# Altium PCB ClassA.PcbDoc
Units mm, origin at the board's own origin, x right, y up, seen from the top; angles counter-clockwise.
Board outline 100 x 57 mm, 2 copper layers (Top Layer, Bottom Layer); 25 components, 11 nets, 90 pads, 2 vias.
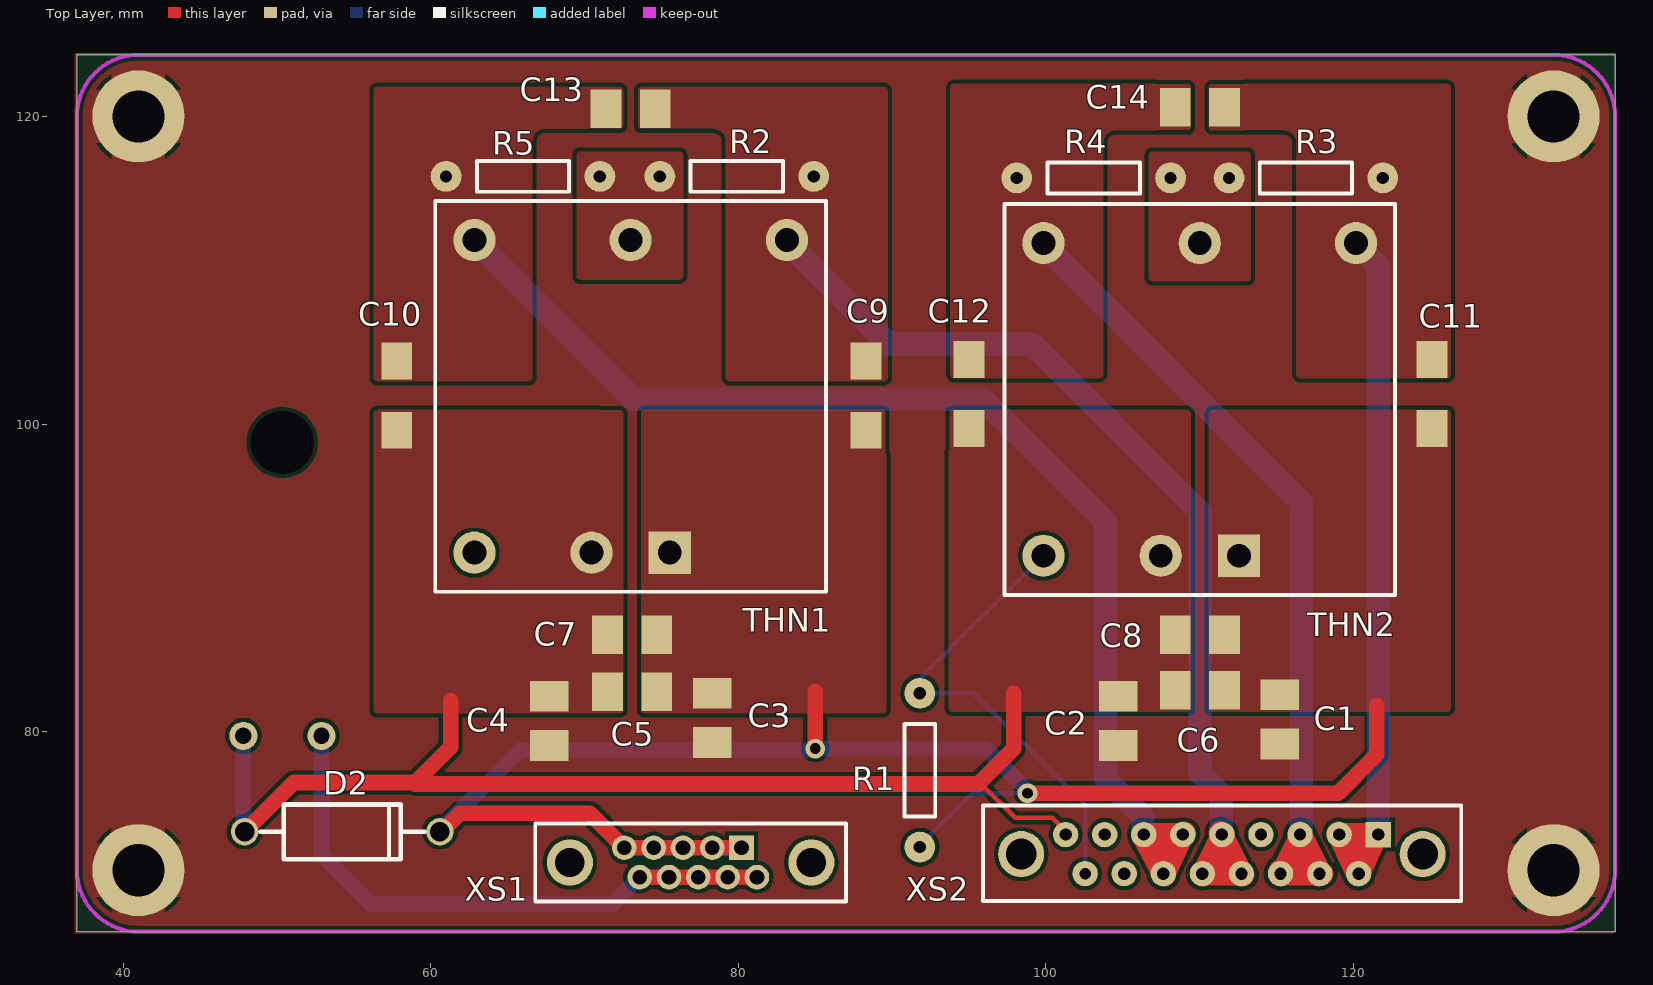
[diagram p0: Top Layer view]
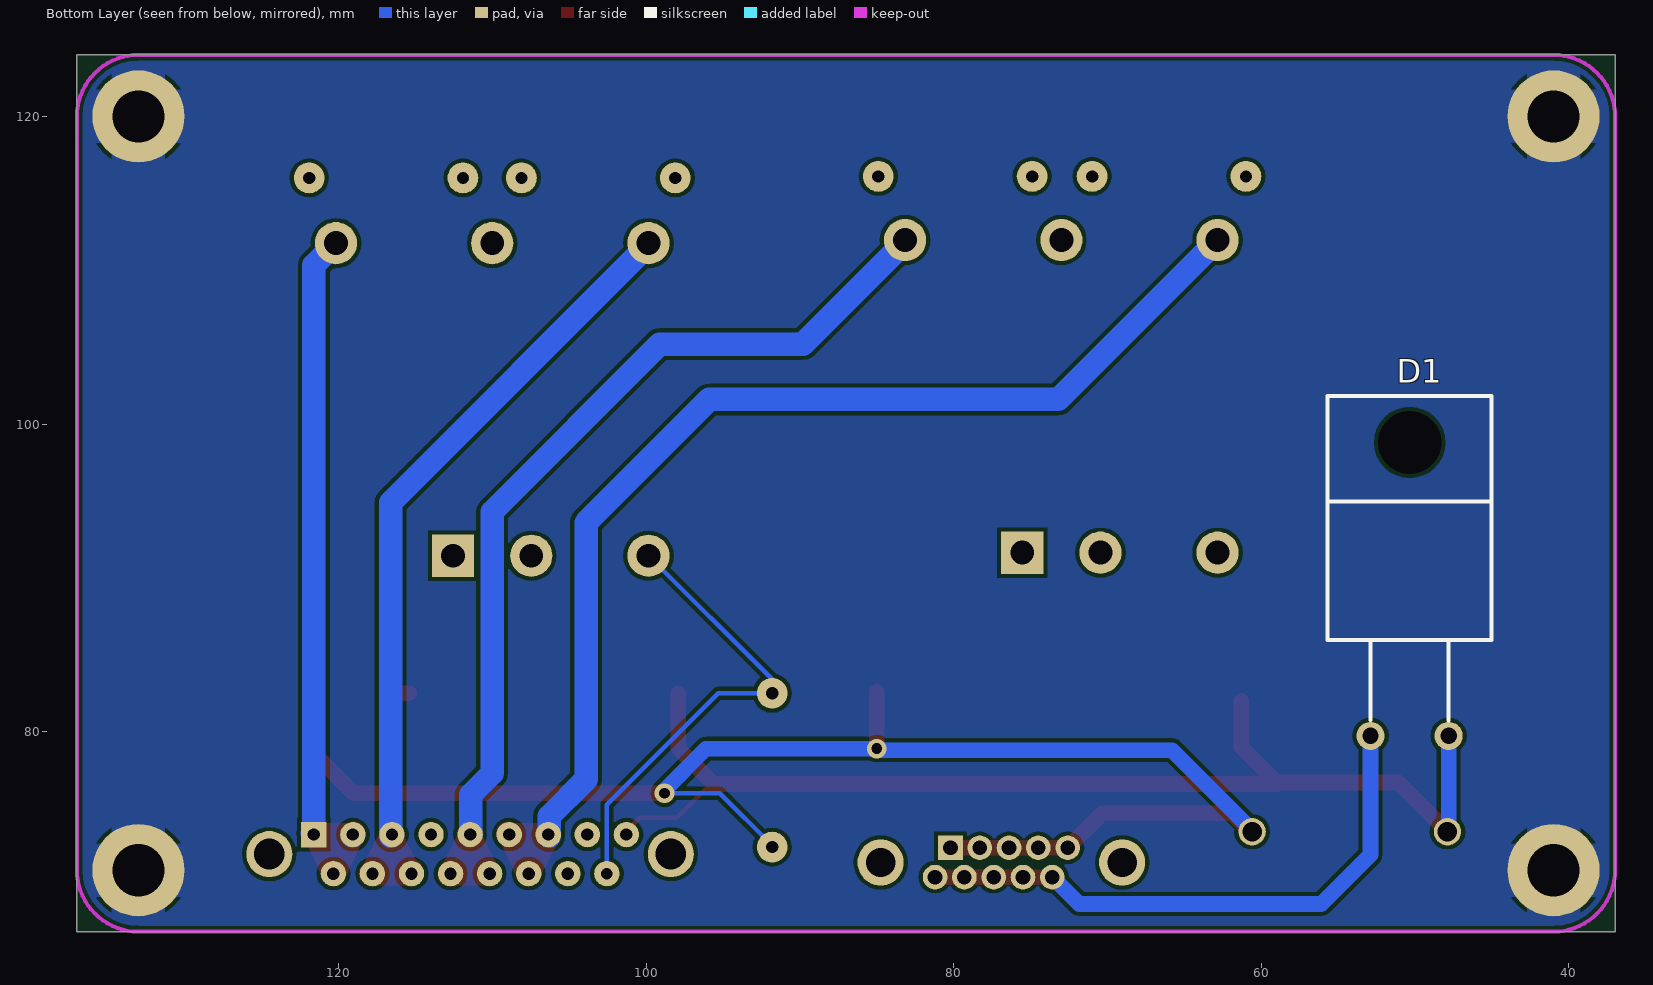
[diagram p1: Bottom Layer view, seen from below]

## Layer stack, top to bottom
Top Layer: signal copper 0.0356
Dielectric: dielectric 0.32, FR-4, Dk 4.8
Bottom Layer: signal copper 0.0356

## Board outline
37,124 137,124 137,67 37,67 37,124

## Components (designator, comment, footprint, x,y, rotation, side; value= is the part's Value field where it differs from the comment)
C1 "" 3225 115.2,82.4 r270 top
C2 "" 3225 104.7,79.1 r90 top
C3 "" 3225 78.3,82.5 r270 top
C4 "" 3225 67.7,79.1 r90 top
C5 "10uF/25V" 3225 74.7,82.6 r180 top
C6 "10uF/25V" 3225 111.6,82.7 r180 top
C7 "1uF/25V" 3225 74.7,86.3 r180 top
C8 "1uF/25V" 3225 111.6,86.3 r180 top
C9 "470pF/2KV" 4520 88.3,99.6 r90 top
C10 "470pF/2KV" 4520 57.8,99.6 r90 top
C11 "470pF/2KV" 4520 125.1,99.7 r90 top
C12 "470pF/2KV" 4520 95,99.7 r90 top
C13 "10uF/25V" 3225 74.6,120.5 r180 top
C14 "10uF/25V" 3225 111.6,120.6 r180 top
D1 "SB10100" SB1030 65.6,84.3 r180 bottom
D2 "P6KE22A" P6KE22A 47.9,74 r180 top
R1 "100欧限流电阻" res 91.8,82.5 r270 top
R2 "调压电阻" res 74.9,116.1 r0 top
R3 "调压电阻" res 111.9,116 r0 top
R4 "调压电阻" res 108.1,116 r180 top
R5 "调压电阻" res 71,116.1 r180 top
THN1 "THN15-1211" THN12-1211 85.7,114.5 r180 top locked
THN2 "THN15-1212" THN12-1212 122.7,114.3 r180 top locked
XS1 "直式不带安装耳插座" 10pin 76.9,71.5 r270 top
XS2 "直式不带安装耳插座" 17pin 95.8,75.1 r270 top locked

## Footprints (in the part's own frame and the unit in brackets; to place one, negate y for a bottom-side part, rotate by r counter-clockwise, add the part's x,y. Pads: shape width x height; smd on the part's side, far side on the other; paste and mask are expansions set on the pad)
10pin [mil] "CRM242-010-221-8800"
  round 118.11 hole 75: 0(0,309.06) 0(0,-309.06)
  rect 63x63 hole 37.48: 1(-37.5,130.32)
  round 63 hole 37.48: 2(37.5,169.68) 3(-37.5,55.32) 4(37.5,94.68) 5(-37.5,-19.68) 6(37.5,19.68) 7(-37.5,-94.68) 8(37.5,-55.32) 9(-37.5,-169.68) 10(37.5,-130.32)
  silkscreen extent -100,-398 100,398
17pin [mil] "CY23Z17BJ-RL"
  round 118.11 hole 78.74: 0(120.39,1129.41) 0(120.39,101.85)
  rect 65x65 hole 31.5: 1(70.39,1015.63)
  round 65 hole 31.5: 2(170.39,965.63) 3(70.39,915.63) 4(170.39,865.63) 5(70.39,815.63) 6(170.39,765.63) 7(70.39,715.63) 8(170.39,665.63) 9(70.39,615.63) 10(170.39,565.63) 11(70.39,515.63) 12(170.39,465.63) 13(70.39,415.63) 14(170.39,365.63) 15(70.39,315.63) 17(70.39,215.63)
  round 65 hole 30: 16(170.39,265.63)
  silkscreen extent -4,4 240,1228
3225 [mm] "TDK电容 C3225X5R1E106K  差模电容"
  rect 2x2.5 smd: 1(0,0) 2(3.2,0)
4520 [mm] "TDK Capacity"
  rect 2.4x2 smd: 1(0,0) 2(4.5,0)
P6KE22A [mil] "600W瞬态抑制管起过压保护"
  round 70 hole 50: 1(0,19.68) 2(-500,19.68)
  silkscreen extent -461,-50 -40,91
res [mm]
  round 2 hole 0.8: 1(0,0) 2(10,0)
  silkscreen extent 2,-1 8,1
SB1030 [mil] "10A肖特基势垒整流器起反接保护"
  round 60 hole 161.42: 0(600.39,570.87)
  round 72 hole 42: 1(700,-180) 2(500,-180)
  silkscreen extent 390,-141 810,690
THN12-1211 [mil] "DC/DC Converter"
  rect 108x108 hole 61: 1(400,900)
  round 108 hole 61: 2(600,900) 3(900,900) 4(100,100) 5(500,100) 6(900,100)
  silkscreen extent 0,0 1000,1000
THN12-1212 [mil] "DC/DC Converter"
  rect 108x108 hole 61: 1(400,900)
  round 108 hole 61: 2(600,900) 3(900,900) 4(100,100) 5(500,100) 6(900,100)
  silkscreen extent 0,0 1000,1000

## Part data
C1 C2 C3 C4: library part "Cap Semi", "封装未定，选大号封装"
C5 C6: library part CAP, "TDK电容 C3225X7R1E106K  差模电容 EMC"
C7 C8: library part CAP, "TDK电容 C3225X7R1E106K  差模电容 去纹波"
C9 C10 C11 C12: library part CAP, "Capacitor TDK C4520X7R3D471K"
C13 C14: library part CAP, "TDK电容 C3225X7R1E106K  差模电容"
D1: library part DIODE, "10A肖特基势垒整流器 君耀雷神 反接保护"
D2: library part DIODE, "君耀雷神 600W瞬态抑制管 过压保护"
R1 R2 R3 R4 R5: library part "Res Semi", "718友益 RMK1608(厚膜) 100欧"
XS1: library part "Header 5X2", "CRM242-010-221-8800 中航光电"
XS2: library part CON17, "CY23Z17BJ-RL 中航光电"

## Free pads (board coordinates)
  round 6 hole 3.4: 1(41,71) 2(41,120) 3(133,120) 4(133,71)

## Via types
v1: diameter 1.27, hole 0.711, Top Layer to Bottom Layer, 2 vias

## Nets (pads, with @x,y where several pads share a name; then routed paths per layer and width w, separated by ;. In a path a pad name is that pad's centre, name@x,y a point inside that pad or via, vN(x,y) a via of type N, cw(c..) or ccw(c..) an arc to the next point about the centre after c; other vN are vias at no path point)
5GND: C10.2 C13.2 R5.2 THN1.6 XS2.11 XS2.12 XS2.13 | length 80.2
  Top Layer w1.524: XS2.13@106.3,73.3 XS2.12@107.7,70.7 ; XS2.13@106.4,73.3 XS2.13@106.369,73.3 ; XS2.13@106.4,73.312 XS2.11 108.912,73.312 XS2.11@109,73.4 ; XS2.12@107.668,70.732 107.675,70.749 XS2.11@108.9,73.4 ; 108.1,71.9 XS2.11@108.791,73.34 ; XS2.13@106.369,73.3 XS2.13 XS2.13@106.369,73.3
  Bottom Layer w1.524: THN1.6 73.2,101.6 95.9,101.6 103.9,93.6 103.9,76.9 106.3,74.5 XS2.13@106.3,73.2
12GND: C12.2 C14.2 R4.2 THN2.6 XS2.4 XS2.5 XS2.6 | length 54.3
  Top Layer w1.524: XS2.6@115.228,70.772 XS2.6 ; XS2.6@115.3,70.7 XS2.5@116.6,73.3 ; XS2.6@115.347,70.947 115.247,70.947 XS2.6 ; XS2.5@116.5,73.4 116.539,73.323 XS2.4@117.8,70.8 ; XS2.4@117.7,70.7 XS2.4@117.7,70.772 ; XS2.4@117.7,70.8 XS2.4@117.7,70.772 ; XS2.4@117.928,70.772 XS2.4 XS2.4@117.7,70.772 ; XS2.6 XS2.4@117.7,70.772
  Bottom Layer w1.524: THN2.6@99.8,111.7 116.6,94.9 XS2.5@116.6,73.2
+5VOUT: C9.2 C13.1 R2.2 THN1.4 XS2.8 XS2.9 XS2.10 | length 64.6
  Top Layer w1.524: XS2.10@110.2,70.7 XS2.9@111.52,73.34 ; XS2.10@110.3,70.8 110.328,70.772 XS2.8 ; XS2.9@111.334,73.444 112.7,70.7 XS2.8@112.8,70.7 ; XS2.9@111.428,73.328 XS2.9 XS2.9@111.437,73.037
  Bottom Layer w1.524: THN1.4@83.1,111.9 89.8,105.2 99.1,105.2 110,94.3 110,77.3 111.4,75.9 XS2.9@111.4,73.3
+12VOUT: C11.2 C14.1 R3.2 THN2.4 XS2.1 XS2.2 XS2.3 | length 50.8
  Top Layer w1.524: XS2.3@119,73.4 XS2.3@119.088,73.312 ; XS2.3 XS2.3@119.088,73.312 ; XS2.3@119.1,73.269 120.277,70.749 120.3,70.7 XS2.1@121.461,73.312 ; XS2.2 XS2.1@121.461,73.312 ; XS2.1@121.5,73.4 121.483,73.363 XS2.1@121.461,73.312 ; XS2.1 XS2.1@121.461,73.312 ; XS2.1@121.6,73.4 121.512,73.312 XS2.3@119.088,73.312
  Bottom Layer w1.524: XS2.3 119.045,73.3 XS2.3@119.1,73.245 ; XS2.3@119.1,73.3 XS2.3@119.112,73.312 ; THN2.4 121.6,110.32 XS2.1@121.6,73.4 ; XS2.1 121.612,73.312 XS2.1@121.7,73.4 ; XS2.1@121.6,73.3 XS2.1@121.6,73.312 ; XS2.1@121.6,73.312 XS2.1@121.6,73.4 ; XS2.1@121.6,73.312 XS2.1@121.6,73.4
+14.4V: C1.1 C3.1 C5.1 C6.1 C7.1 C8.1 C9.1 C11.1 D2.2 R1.2 THN1.1 THN2.1 XS1.1 XS1.3 XS1.5 XS1.7 XS1.9 | length 102.1
  Top Layer w1.016: D2.2@60.7,73.5 61.9,74.7 70.343,74.7 XS1.9 XS1.7 XS1.5 XS1.3 80.152,72.452 XS1.1@80.2,72.5 ; v1(85,78.9) 85,82.6 ; v1(98.8,76) 119,76 121.4,78.4 121.4,78.5 ; C1.1@115.4,82.5 C1.1@115.9,82.5 ; 121.5,78.5 121.5,81.7
  Bottom Layer w0.3: R1.2 91.8,72.6 95.2,76 v1(98.8,76)
  Bottom Layer w1.016: D2.2@60.5,73.6 60.6,73.6 65.8,78.8 v1@85,78.8 ; v1(85,78.9) 96.1,78.9 v1@98.8,76.2
GND2: C2.2 C4.2 C5.2 C6.2 C7.2 C8.2 C10.1 C12.1 D1.1 D2.1 THN1.2 THN2.2 XS2.17 | length 75.3
  Top Layer w0.3: 95.7,76.7 98,74.4 100.4,74.4 101.3,73.5 XS2.17@101.3,73.4
  Top Layer w1.016: D2.1 51.1,76.7 59,76.7 61.3,79 61.3,82 ; 59,76.6 95.7,76.6 ; 95.7,76.7 97.9,78.9 97.9,82.5
  Bottom Layer w1.016: D2.1@47.82,73.58 D1.1
GNDP: D1.2 XS1.2 XS1.4 XS1.6 XS1.8 XS1.10 | length 38.1
  Top Layer w1.016: XS1.10 XS1.8 XS1.6 XS1.4 81.153,70.547 XS1.2@81.2,70.5
  Bottom Layer w1.016: D1.2@52.9,79.7 52.9,72 56.1,68.8 71.843,68.8 XS1.10
KGND: C1.2 C2.1 C3.2 C4.1 pad.1 pad.2 pad.3 pad.4
NetR2_1: R2.1 R5.1 THN1.5
NetR3_1: R3.1 R4.1 THN2.5
RCOP: R1.1 THN2.3 XS2.16 | length 29.6
  Bottom Layer w0.3: R1.1 95.3,82.5 102.547,75.253 XS2.16 ; R1.1@91.8,83.4 THN2.3
pads on no net: D1.0 THN1.3 XS1.0 XS2.0 XS2.7 XS2.14 XS2.15

## Polygon pours and split planes (outlines as drawn)
KGND on Top Layer "Top Layer-No Net" (solid): 37,124 137,124 137,67 37,67 37,123.9 36.9,124
KGND on Top Layer "Top Layer-No Net" (solid): 36.9,124 37,124.1 137,124.1 137,67.1 136.9,67 136.8,66.9 36.9,66.9 36.9,124 37,124.1
5GND on Top Layer "Top Layer-No Net" (solid, pour order 1000): 56,122.2 72.8,122.2 72.8,118.9 67.4,118.9 67.4,118.5 66.9,118.5 66.9,102.6 66.8,102.5 66.7,102.4 56,102.4 56,122.2
+5VOUT on Top Layer "Top Layer-No Net" (solid, pour order 1001): 73.2,122.2 89.9,122.2 90,122.2 90,102.5 78.9,102.5 78.9,118.4 78.4,118.4 78.4,118.9 78.3,118.8 73.2,118.8 73.2,122.2
NetR2_1 on Top Layer "Top Layer-No Net" (solid, pour order 1002): 69.2,118 76.7,118 76.7,109.1 76.6,109 69.2,109 69.2,118
GND2 on Top Layer "Top Layer-No Net" (solid, pour order 1003): 56,101.2 72.8,101.2 72.8,81 72.7,80.9 56,80.9 56,101.2
+14.4V on Top Layer "Top Layer-No Net" (solid, pour order 1004): 73.4,101.2 89.9,101.2 89.9,81 89.8,80.9 73.4,80.9 73.4,101.1 73.3,101.2
12GND on Top Layer "Top Layer-No Net" (solid, pour order 1005): 93.5,122.4 109.7,122.4 109.7,118.8 104.4,118.8 104.4,118.4 104,118.4 104,102.8 103.9,102.7 93.5,102.7 93.5,122.4
+12VOUT on Top Layer "Top Layer-No Net" (solid, pour order 1006): 110.3,122.4 110.3,118.8 115.7,118.8 115.7,118.3 116,118.3 116,102.7 126.6,102.7 126.6,122.4 110.3,122.4
NetR3_1 on Top Layer "Top Layer-No Net" (solid, pour order 1007): 106.4,118 113.6,118 113.6,109 106.4,109 106.4,118
+14.4V on Top Layer "Top Layer-No Net" (solid, pour order 1008): 110.3,101.2 126.6,101.2 126.6,80.9 110.3,80.9 110.2,80.8 110.2,101.2
GND2 on Top Layer "Top Layer-No Net" (solid, pour order 1009): 93.4,101.2 109.7,101.2 109.7,81 93.4,81 93.3,81.1 93.3,101.2
KGND on Bottom Layer "Top Layer-No Net" (solid): 37,124 137,124 137,67 37,67 37,124

## Keep-outs
Keep-Out Layer:
  lines w0.254: 37,71 ccw(c41,71) 41,67 133,67 ccw(c133,71) 137,71 137,120 ccw(c133,120) 133,124 41,124 ccw(c41,120) 37,120 37,71